# EAGLE board Blinky_board (EAGLE 7.5.0)

No outline drawn. Coordinates in mm, seen from the top.
Copper layers (1*16): Top 0.035mm / dielectric 1.5mm / Bottom 0.035mm
Design rules "default": minimum track width 10mil, minimum drill 24mil, track to track 8mil, track to pad 8mil, pad to pad 8mil, via to via 8mil, smd to smd 8mil, copper to edge 40mil, drill to drill 8mil, minimum pad ring 10mil, minimum via ring 8mil, stop-mask expansion 4mil, vias tented up to drill 0mil, thermal gap 10mil

## Footprints (pad centres in the part's own frame; a part is rotated, then mirrored left to right if it is on the bottom)
CAP_100MIL = drill 0.8 pad 1.4 long: 1 -1.27,0; 2 1.27,0
TORAGI-LPC-WRITER = drill 1 pad 1.6 long: 1 0,0; 2 2.54,0; 3 5.08,0; 4 7.62,0; 5 10.16,0; 6 12.7,0; 7 15.24,0; 8 17.78,0
LED5MM = drill 0.813 long: A -1.27,0; K 1.27,0
3,2 = hole 3.2: 0,0
RESISTOR_0204_200MIL = drill 0.7 pad 1.3: 1 -2.54,0; 2 2.54,0
DIL08 = drill 0.813 long: 1 -3.81,-3.81; 2 -1.27,-3.81; 3 1.27,-3.81; 4 3.81,-3.81; 5 3.81,3.81; 6 1.27,3.81; 7 -1.27,3.81; 8 -3.81,3.81

## Placement (x,y rotation side)
C1  0.1uF  [CAP_100MIL]  -8.89,-86.36 0 top
CN1  TORAGI-LPC-WRITER  [TORAGI-LPC-WRITER]  -6.35,-53.34 0 top
D1  LED_5MM  [LED5MM]  -7.62,-68.58 0 top
D2  LED_5MM  [LED5MM]  -7.62,-60.96 0 top
H1  MOUNT_HOLE_3.2  [3,2]  -7.62,-17.78 0 top
H2  MOUNT_HOLE_3.2  [3,2]  -7.62,-26.67 0 top
H3  MOUNT_HOLE_3.2  [3,2]  -7.62,-35.56 0 top
H4  MOUNT_HOLE_3.2  [3,2]  -7.62,-44.45 0 top
R1  330  [RESISTOR_0204_200MIL]  -7.62,-74.93 0 top
R2  330  [RESISTOR_0204_200MIL]  -7.62,-78.74 0 top
U1  LPC810M021FN8  [DIL08]  -3.81,-95.25 0 top

## Library data of the parts
C1 D1 D2 R1 R2 U1 = Parts
CN1 = PartsForProto
H1-H4 = Generic

## Nets
0V: C1.2 CN1.8 U1.7
+3V3: C1.1 CN1.1 R1.2 R2.2 U1.6
N$1: D1.A R1.1
N$2: D2.A R2.1
N$3: CN1.6 U1.1
N$4: CN1.2 U1.4
N$5: D2.K U1.5
N$6: D1.K U1.8
N$7: CN1.3 U1.3

## Tracks (layer width: path | path; a pad name or v marks a point on that pad's centre or on a via)
0V  (2 unrouted)
+3V3  (4 unrouted)
N$1  (1 unrouted)
N$2  (1 unrouted)
N$3  (1 unrouted)
N$4  (1 unrouted)
N$5  (1 unrouted)
N$6  (1 unrouted)
N$7  (1 unrouted)